# Altium PCB MainBoard.PcbDoc
Units mm, origin at the board's own origin, x right, y up, seen from the top; angles counter-clockwise.
Board outline 152.4 x 101.6 mm, 2 copper layers (Top Layer, Bottom Layer); 52 components, 40 nets, 203 pads, 51 vias.
Unrouted connection lines stored in the file: 105.
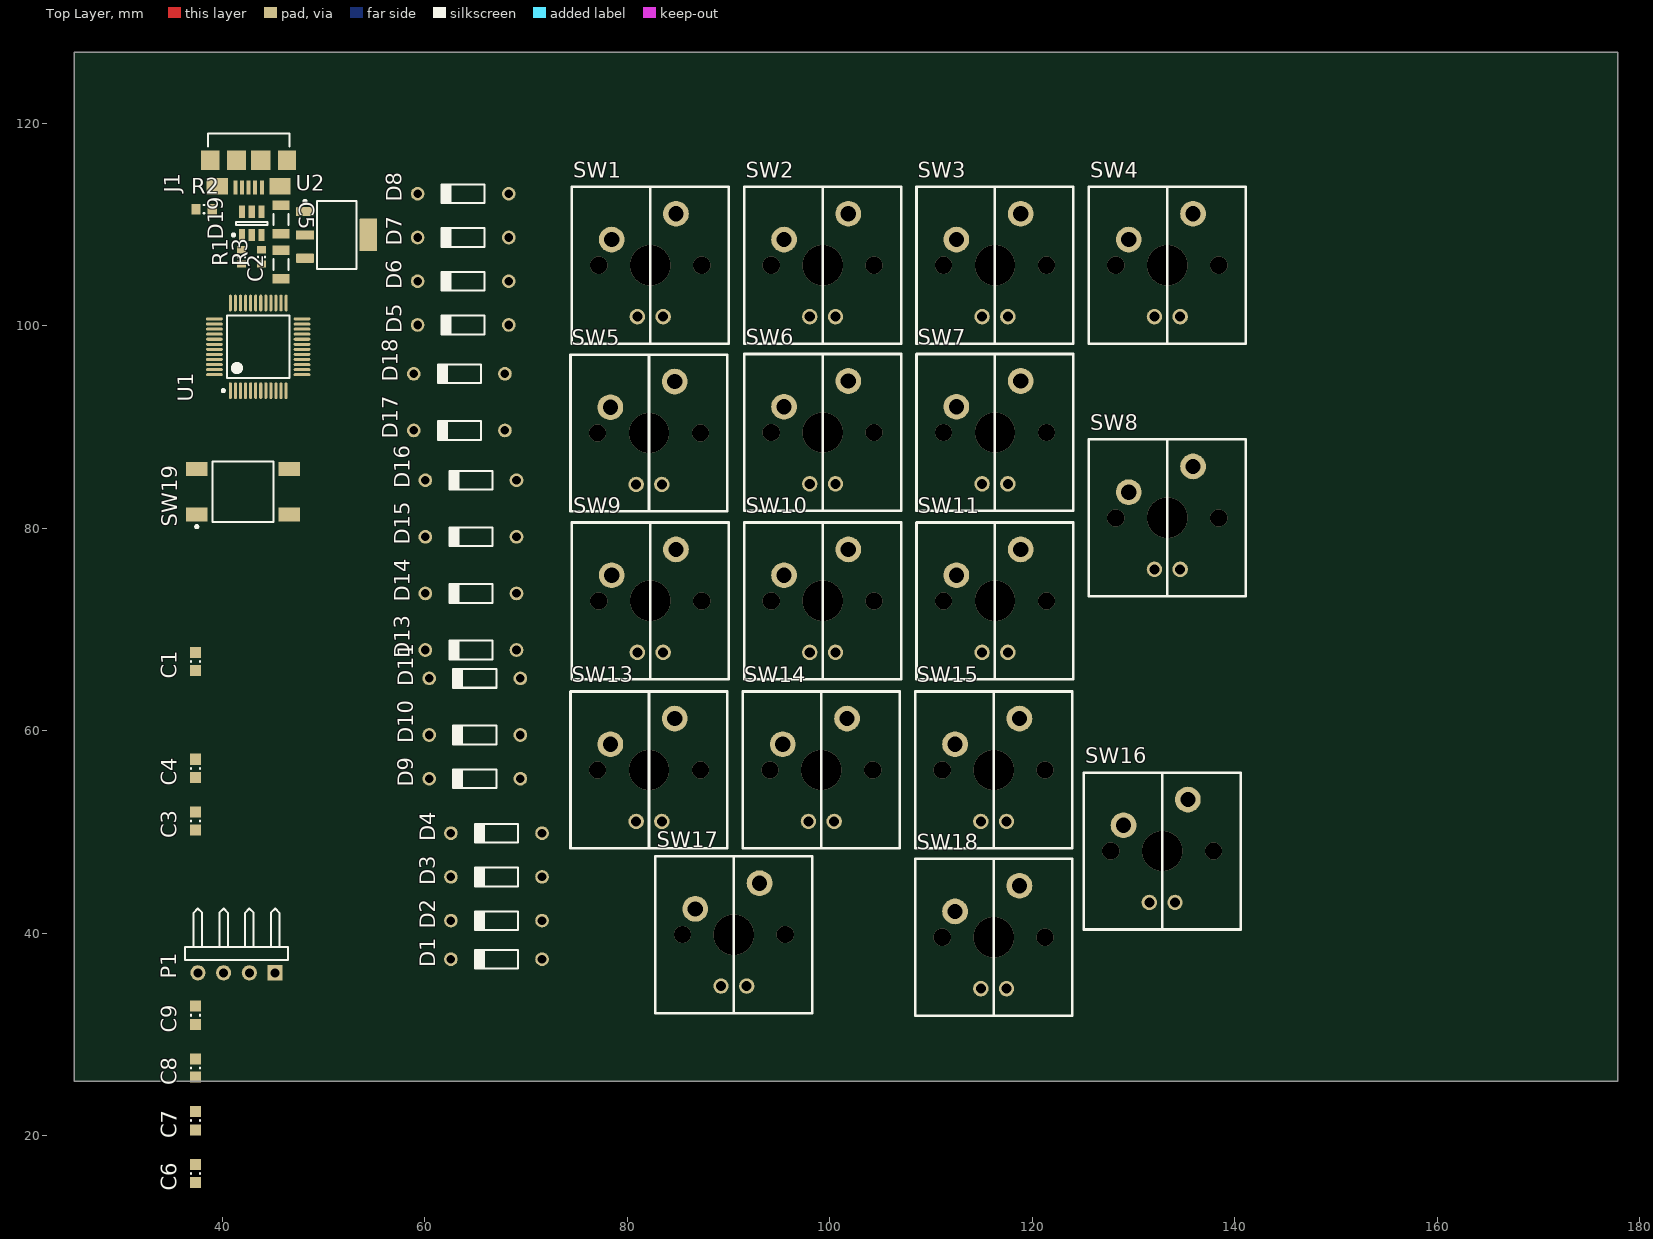
[diagram p0: Top Layer view]
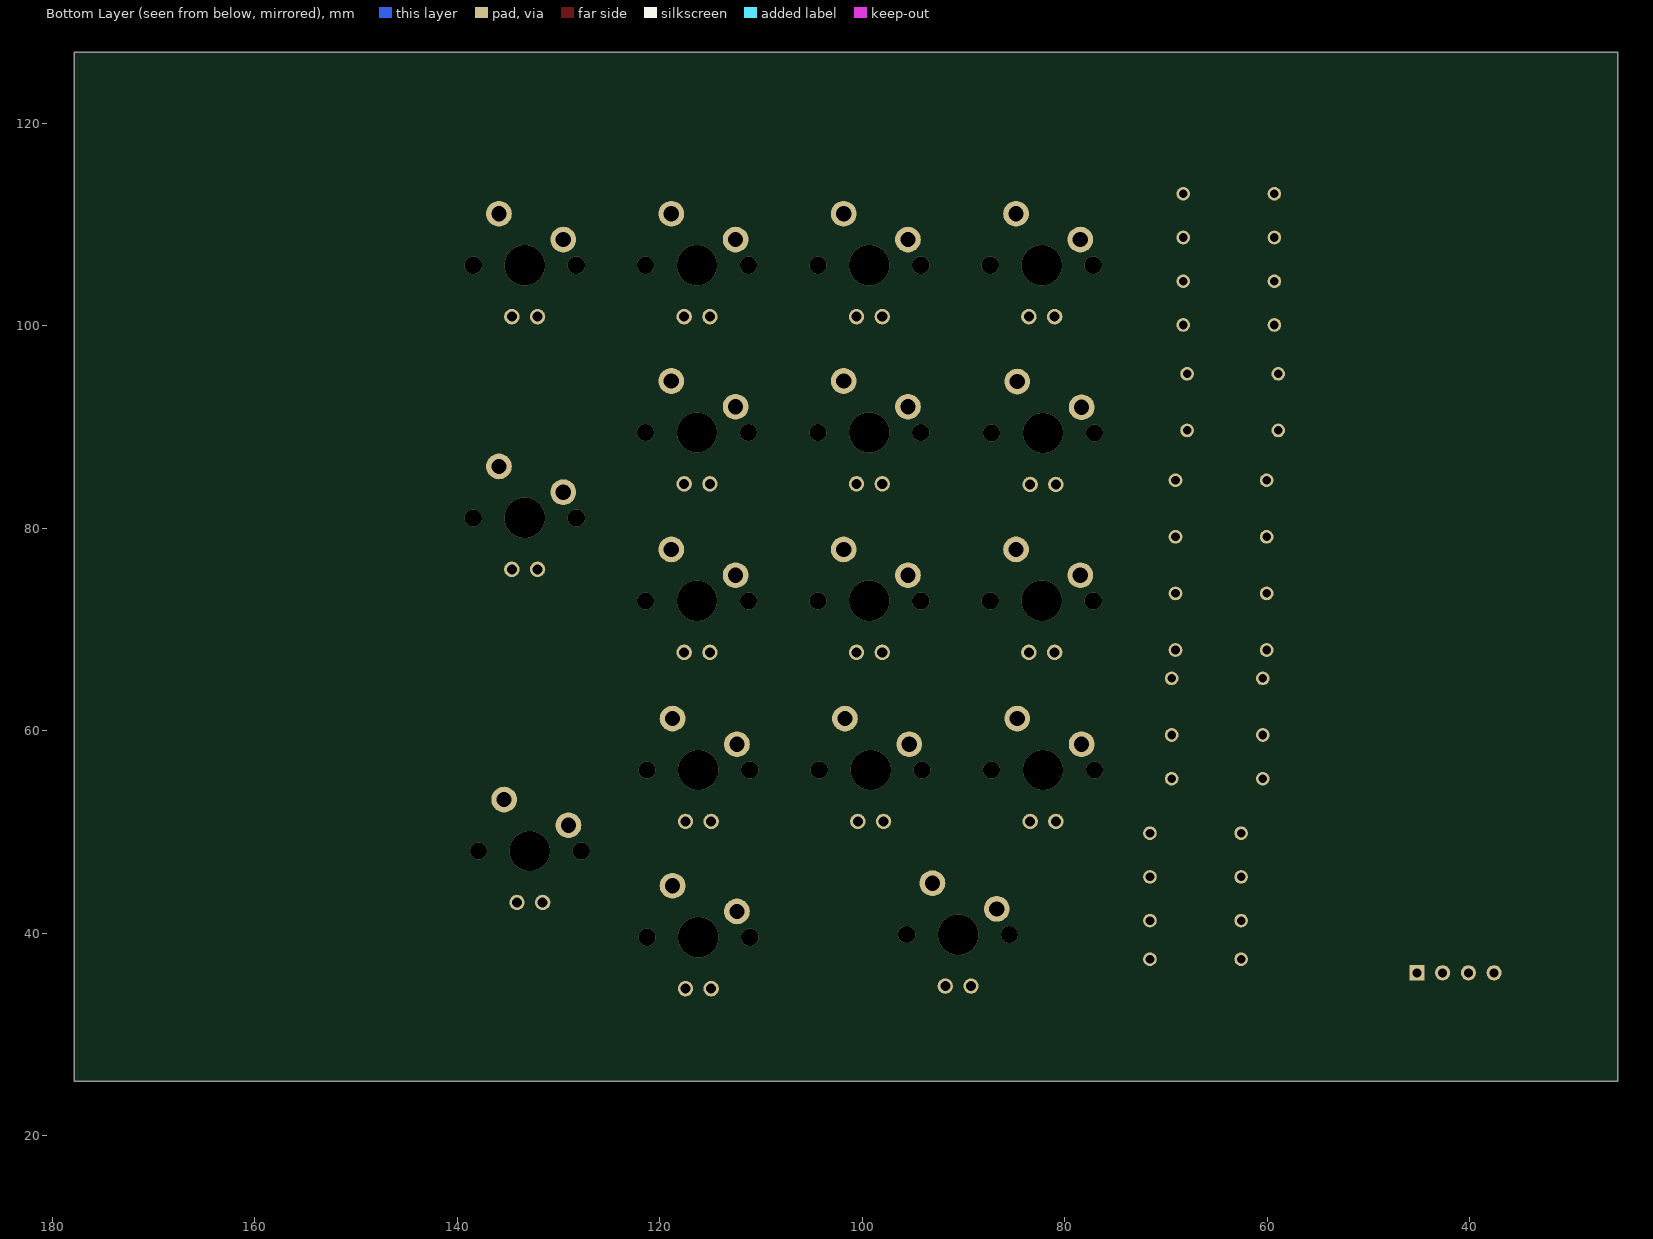
[diagram p1: Bottom Layer view, seen from below]

## Layer stack, top to bottom
Top Solder: solder mask 0.0102, Solder Resist, Dk 3.5
Top Layer: signal copper 0.0356
Dielectric 1: dielectric 0.32, FR-4, Dk 4.8
Bottom Layer: signal copper 0.0356
Bottom Solder: solder mask 0.0102, Solder Resist, Dk 3.5

## Board outline
25.4,25.4 177.8,25.4 177.8,127 25.4,127

## Design rules (kind name [scope] priority, off if disabled: settings)
Clearance [All] p1: gap=0.2 ignorepadtopadclearanceinfootprint=FALSE
PolygonConnect [All] p1: connectstyle=Relief reliefconductorwidth=0.254 reliefentries=4 polygonreliefangle="90 Angle" airgapwidth=0.254
RoomDefinition MCU [InComponentClass('MCU')] p1: confinementstyle=ConfineIn formatcopy=TRUE lockcomponents=FALSE outline 55.893,14.135 55.893,125.133 33.541,125.133 33.541,14.135
RoomDefinition Keys [InComponentClass('Keys')] p2: confinementstyle=ConfineIn formatcopy=TRUE lockcomponents=FALSE outline 6.707,31.17 178.411,31.17 178.411,117.53 6.707,117.53
RoutingVias [All] p1: holewidth=0.711 width=1.27 viastyle="Through Hole" minholewidth=0.711 minwidth=1.27 maxholewidth=0.711 maxwidth=1.27
SolderMaskExpansion [All] p1: expansion=0.06
Width [All] p1: maxlimit=0.254 minlimit=0.254 preferedwidth=0.254
30 further rules are at their usual default settings.

## Classes and differential pairs
component class MCU: C1 C2 C3 C4 C5 C6 C7 C8 C9 D19 J1 P1 R1 R2 R3 SW19 U1 U2
component class Keys: D1 D2 D3 D4 D5 D6 D7 D8 D9 D10 D11 D13 D14 D15 D16 D17 D18 SW1 SW2 SW3 SW4 SW5 SW6 SW7 SW8 SW9 SW10 SW11 SW13 SW14 SW15 SW16 SW17 SW18

## Components (designator, comment, footprint, x,y, rotation, side; value= is the part's Value field where it differs from the comment)
C1 "100nF" CAPC0603(1608)100_M 37.351,66.84 r90 top
C2 "10uF" CAPC1206(3216)190_L 45.811,106.042 r90 top
C3 "100nF" CAPC0603(1608)100_M 37.351,51.092 r90 top
C4 "100nF" CAPC0603(1608)100_M 37.351,56.299 r90 top
C5 "10uF" CAPC1206(3216)190_L 45.811,110.49 r270 top
C6 "100nF" CAPC0603(1608)100_M 37.351,16.294 r90 top
C7 "100nF" CAPC0603(1608)100_M 37.351,21.501 r90 top
C8 "100nF" CAPC0603(1608)100_M 37.351,26.708 r90 top
C9 "100nF" CAPC0603(1608)100_M 37.351,31.915 r90 top
D1 "1N4148" NXP-SOD27-2_V 67.087,37.448 r180 top
D2 "1N4148" NXP-SOD27-2_V 67.087,41.258 r180 top
D3 "1N4148" NXP-SOD27-2_V 67.087,45.576 r180 top
D4 "1N4148" NXP-SOD27-2_V 67.087,49.894 r180 top
D5 "1N4148" NXP-SOD27-2_V 63.802,100.076 r180 top
D6 "1N4148" NXP-SOD27-2_V 63.802,104.394 r180 top
D7 "1N4148" NXP-SOD27-2_V 63.802,108.712 r180 top
D8 "1N4148" NXP-SOD27-2_V 63.802,113.03 r180 top
D9 "1N4148" NXP-SOD27-2_V 64.945,55.272 r180 top
D10 "1N4148" NXP-SOD27-2_V 64.945,59.59 r180 top
D11 "1N4148" NXP-SOD27-2_V 64.945,65.178 r180 top
D13 "1N4148" NXP-SOD27-2_V 64.564,67.98 r180 top
D14 "1N4148" NXP-SOD27-2_V 64.564,73.568 r180 top
D15 "1N4148" NXP-SOD27-2_V 64.564,79.156 r180 top
D16 "1N4148" NXP-SOD27-2_V 64.564,84.744 r180 top
D17 "1N4148" NXP-SOD27-2_V 63.421,89.662 r180 top
D18 "1N4148" NXP-SOD27-2_V 63.421,95.25 r180 top
D19 "USBLC6-2SC6" STM-SOT23-6L_V 42.926,110.109 r90 top
J1 "10118192-0001LF" FCI-10118192-0001LF-5_V 42.615,116.332 r180 top
P1 "SWD" HDR1X4H 45.225,36.106 r180 top
R1 "10R" RESC0603(1608)_L 41.91,106.807 r90 top value="10.00 Ohm"
R2 "100K" RESC0603(1608)_N 38.227,111.506 r0 top value="100000.00 Ohm"
R3 "10R" RESC0603(1608)_L 43.876,106.807 r90 top value="10.00 Ohm"
SW1 "Cherry MX LED" "Cherry MX LED" 82.272,105.973 r0 top
SW2 "Cherry MX LED" "Cherry MX LED" 99.29,105.973 r0 top
SW3 "Cherry MX LED" "Cherry MX LED" 116.308,105.973 r0 top
SW4 "Cherry MX LED" "Cherry MX LED" 133.326,105.973 r0 top
SW5 "Cherry MX LED" "Cherry MX LED" 82.145,89.408 r0 top
SW6 "Cherry MX LED" "Cherry MX LED" 99.29,89.463 r0 top
SW7 "Cherry MX LED" "Cherry MX LED" 116.308,89.463 r0 top
SW8 "Cherry MX LED" "Cherry MX LED" 133.326,81.026 r0 top
SW9 "Cherry MX LED" "Cherry MX LED" 82.272,72.826 r0 top
SW10 "Cherry MX LED" "Cherry MX LED" 99.29,72.826 r0 top
SW11 "Cherry MX LED" "Cherry MX LED" 116.308,72.826 r0 top
SW13 "Cherry MX LED" "Cherry MX LED" 82.145,56.134 r0 top
SW14 "Cherry MX LED" "Cherry MX LED" 99.163,56.134 r0 top
SW15 "Cherry MX LED" "Cherry MX LED" 116.181,56.134 r0 top
SW16 "Cherry MX LED" "Cherry MX LED" 132.818,48.133 r0 top
SW17 "Cherry MX LED" "Cherry MX LED" 90.527,39.878 r0 top
SW18 "Cherry MX LED" "Cherry MX LED" 116.181,39.624 r0 top
SW19 "4-1437565-1" TECO-4-1437565-1_V 42.05,83.604 r90 top
U1 "STM32F072C8T6" STM-LQFP48_M 43.561,97.917 r90 top
U2 "LM1117IMP3.3" DCY0004A_N 51.308,108.966 r0 top

## Footprints (in the part's own frame and the unit in brackets; to place one, negate y for a bottom-side part, rotate by r counter-clockwise, add the part's x,y. Pads: shape width x height; smd on the part's side, far side on the other; paste and mask are expansions set on the pad)
CAPC0603(1608)100_M [mm] "Chip Capacitor, Body 1.6x0.8mm, Height 1.0mm, IPC Low Density"
  rect 1.1x1.1 smd: 1(-0.9,0) 2(0.9,0)
  silkscreen extent -0.05,-0.45 0.05,0.45, body extent -0.87,-0.47 0.88,0.48, height 1
CAPC1206(3216)190_L [mm] "Chip Capacitor, Body 3.2x1.6mm, Height 1.9mm, IPC High Density"
  rect 0.95x1.7 smd: 1(-1.4,0) 2(1.4,0)
  silkscreen extent -0.55,-0.75 0.55,0.75, body extent -1.7,-0.9 1.7,0.9, height 1.9
"Cherry MX LED" [mil]
  round 100 hole 59: 1(-150,100) 2(100,200)
  round 60 hole 39: 3(-50,-200) 4(50,-200)
  silkscreen extent -305,-305 305,305, body extent -310,-310 310,310, height 460
DCY0004A_N [mm] "SOT223, 4-Leads, Body 6.7x3.7mm, Pitch 2.3mm, IPC Medium Density"
  rrect11% 1.75x0.9 smd: 1(-3.125,2.3) 2(-3.125,0) 3(-3.125,-2.3)
  rrect6% 1.75x3.2 smd: 4(3.125,0)
  silkscreen extent -3.25,-3.35 1.95,3.42, body extent -3.5,-3.25 3.5,3.25, height 1.62
FCI-10118192-0001LF-5_V [mm] "SMD, 5-Leads, Body 8.05x5.77mm, Pitch 0.65mm"
  rect 0.4x1.35 smd: 1(-1.3,2.675) 2(-0.65,2.675) 3(0,2.675) 4(0.65,2.675) 5(1.3,2.675)
  rect 2.1x1.6 smd: 6(-3.1,2.55) 7(3.1,2.55)
  rect 1.8x1.9 smd: 8(-3.8,0) 9(3.8,0)
  rect 1.9x1.9 smd: 10(-1.2,0) 11(1.2,0)
  silkscreen extent -4.03,-2.67 4.03,-1.35, body extent -4.03,-2.67 4.03,3.1, height 2.7
HDR1X4H [mm] "Connector; Header; 4 Position; Right Angle"
  rect 1.5x1.5 hole 0.9: 1(0,0)
  round 1.5 hole 0.9: 2(2.54,0) 3(5.08,0) 4(7.62,0)
  silkscreen extent -1.27,-6.35 8.89,-1.27
NXP-SOD27-2_V [mm] "SOD27, 2-Leads, Dia 1.85mm, Body Length 4.25mm, Pin Spacing 9mm"
  round 1.35 hole 0.85: 1(-4.5,0) 2(4.5,0)
  silkscreen extent -2.12,-0.93 2.12,0.92, body extent -4.78,-0.92 4.78,0.92, height 1.84
RESC0603(1608)_L [mm] "Chip Resistor, Body 1.6x0.8mm, IPC High Density"
  rect 0.7x0.9 smd: 1(-0.7,0) 2(0.7,0)
  silkscreen extent -0.05,-0.35 0.05,0.35, body extent -0.85,-0.47 0.85,0.47, height 0.6
RESC0603(1608)_N [mm] "Chip Resistor, Body 1.6x0.8mm, IPC Medium Density"
  rect 0.9x1 smd: 1(-0.8,0) 2(0.8,0)
  silkscreen extent -0.05,-0.4 0.05,0.4, body extent -0.85,-0.47 0.85,0.47, height 0.6
STM-LQFP48_M [mm] "QFP, 48-Leads, Body 7x7mm, Pitch 0.5mm, IPC Low Density"
  oval 1.65x0.3 smd: 1(-4.325,2.75) 2(-4.325,2.25) 3(-4.325,1.75) 4(-4.325,1.25) 5(-4.325,0.75) 6(-4.325,0.25) 7(-4.325,-0.25) 8(-4.325,-0.75) 9(-4.325,-1.25) 10(-4.325,-1.75) 11(-4.325,-2.25) 12(-4.325,-2.75) 25(4.325,-2.75) 26(4.325,-2.25) 27(4.325,-1.75) 28(4.325,-1.25) 29(4.325,-0.75) 30(4.325,-0.25) 31(4.325,0.25) 32(4.325,0.75) 33(4.325,1.25) 34(4.325,1.75) 35(4.325,2.25) 36(4.325,2.75)
  oval 0.3x1.65 smd: 13(-2.75,-4.325) 14(-2.25,-4.325) 15(-1.75,-4.325) 16(-1.25,-4.325) 17(-0.75,-4.325) 18(-0.25,-4.325) 19(0.25,-4.325) 20(0.75,-4.325) 21(1.25,-4.325) 22(1.75,-4.325) 23(2.25,-4.325) 24(2.75,-4.325) 37(2.75,4.325) 38(2.25,4.325) 39(1.75,4.325) 40(1.25,4.325) 41(0.75,4.325) 42(0.25,4.325) 43(-0.25,4.325) 44(-0.75,4.325) 45(-1.25,4.325) 46(-1.75,4.325) 47(-2.25,4.325) 48(-2.75,4.325)
  silkscreen extent -4.45,-3.1 3.1,3.57, body extent -3.5,-3.5 3.5,3.5, height 1.6
STM-SOT23-6L_V [mm] "SOT23, 6-Leads, Body 3.05x1.75mm, Pitch 0.95mm"
  rect 1.2x0.6 smd: 1(-1.15,0.95) 2(-1.15,0) 3(-1.15,-0.95) 4(1.15,-0.95) 5(1.15,0) 6(1.15,0.95)
  silkscreen extent -1.27,-1.55 0.15,1.92, body extent -1.6,-1.53 1.6,1.53, height 1.45
TECO-4-1437565-1_V [mil] "SMD, 4-Leads, Body 6x6mm, Pitch 9.1mm"
  rect 55x83 smd: 1(-88.5,179.5) 2(-88.5,-179.5) 3(88.5,179.5) 4(88.5,-179.5)
  silkscreen extent -141,-118 118,184, body extent -118,-197 118,197, height 200

## Part data
C1 C3 C4 C6 C7 C8 C9: library part CMP-1035-02590-1, "CAP 100nF 25V -20% to +80% 0603 (1608 Metric) Thickness 1mm SMD", Case-EIA=0603, Case-Metric=1608, Rated Voltage="25 V", Tolerance="-20% to +80%", Max Thickness="1 mm", Technology=SMT
C2 C5: library part CMP-1037-04974-1, "CAP 10uF 16V ±10% 1206 (3216 Metric) Thickness 1.9mm SMD", Case-EIA=1206, Case-Metric=3216, Rated Voltage="16 V", Tolerance=±10%, Max Thickness="1.9 mm", Technology=SMT
D1 D2 D3 D4 D5 D6 D7 D8 D9 D10 D11 D13 D14 D15 D16 D17 D18: library part CMP-0648-00002-1, "High-speed Diode, 100 V, 450 mA, 2-Pin SOD27, RoHS", Manufacturer="NXP Semiconductors", Cd="4 pF Max.", ComponentLink1Description="Manufacturer URL", ComponentLink1URL=http://www.nxp.com/, ComponentLink2Description=Datasheet, ComponentLink2URL=http://www.nxp.com/documents/data_sheet/1N4148_1N4448.pdf, ComponentLink3Description="Package Specification", ComponentLink3URL=http://www.nxp.com/documents/data_sheet/1N4148_1N4448.pdf, Configuration=Single, DatasheetVersion=Aug-04, IF="200 mA Max.", IFRM="450 mA", IFSM="4 A Max.", IR (VR="20 V)=25 nA", Mounting Technology="Through Hole", PackageDescription="2-Pin Hermetically Sealed Glass Package, Axial Leaded, Dia 1.85 mm, Body Length 4.25 mm, Lead Spread 25.4 mm", PackageReference=SOD27, PackageVersion=Aug-04, PartNumber=1N4148, RoHS=TRUE, Trr="4 ns Max.", VF (IF="10 mA)=1 V", VR="100 V Max."
D19: library part CMP-2000-05378-1, "Very low capacitance ESD protection, 3.5 pF, -40 to 125 degC, 6-Pin SOT23, RoHS, Tape and Reel", Capacitance Value=3.5pF, Clamping Voltage=17V, Leakage Current=0.15uA, Manufacturer=STMicroelectronics, Operating Temperature Classification=Automotive, Operating Temperature Max Deg. C=125C, Operating Temperature Min Deg. C=-40C, Operating Temp Range=-40Cto125C, Package / Case=SOT-23, Package Description="6-Pin Small Outline Transistor, Body 2.925 x 1.625 mm, Pitch 0.95 mm", Package Reference=SOT23-6L, Peak Pulse Current=5A, Reverse Breakdown Voltage=6V, Reverse Stand-off Voltage=5V, Test Current (It)=1mA, Clamping Voltage (Max)=17V, Configuration=Dual, Datasheet URL=http://www.st.com/st-web-ui/static/active/en/resource/technical/document/datasheet/CD00050750.pdf, Datasheet Version="Rev. 5, 10/2011", Direction Type=Uni-Directional, Leakage Current (Max)=0.15uA, Manufacturer URL=http://www.st.com/, Mounting=SurfaceMount, Mounting Style=SurfaceMount, Number of Elements=1, Packaging=TapeandReel, Pin Count=6, Polarity=Uni-Directional, Product Depth (mm)=1.75mm, Product Height (mm)=1.3mm, Product Length (mm)=3.05mm, Rad Hardened=No, Suppressor Type=DiodeArrays, Working Voltage=5V, Working Voltage (Max)=5V
J1: library part CMP-2000-05118-1, "Micro USB B Type Receptacle, -55 to 85 degC, 5-Pin SMD, RoHS, Tape and Reel", Color=Black, Current Rating=1.8A, Flammability Rating=UL94V-0, Insulation Resistance=1000MOhms, Manufacturer=FCI, Operating Temperature Range=-55Cto+85C, Brand=FCI, Connector Type=MicroUSBTypeBreceptacle, Contact Material=CopperAlloy, Contact Plating=Gold, Datasheet URL=http://www.mouser.com/ds/2/154/10118192-793027.pdf, Datasheet Version="Rev. B, 05/2015", Factory Pack Quantity=1400, Gender=Female, Manufacturer URL=http://www.fci.com/, Mounting Angle=Right, Number of Contacts=5Contact, Packaging=Reel, Product=MicroUSBTypeBConnectors, Product Category=USBConnectors, RoHS=Details, Standard=USB2.0, Termination Style=SMD/SMT
P1: library part "Header 4H", "Header, 4-Pin, Right Angle", LatestRevisionDate=17-Jul-2002, LatestRevisionNote="Re-released for DXP Platform.", Publisher="Altium Limited"
R1 R3: library part CMP-1012-00284-1, "10R 0.1W 1% 0603 (1608 Metric)  SMD", Case-EIA=0603, Case-Metric=1608, Power="0.1 W", Tolerance="1 %", Technology=SMT
R2: library part CMP-1012-00736-1, "100K 0.1W 1% 0603 (1608 Metric)  SMD", Case-EIA=0603, Case-Metric=1608, Power="0.1 W", Tolerance="1 %", Technology=SMT
SW19: library part CMP-2000-05602-1, "Tactile Switch, 50 mA, 12 VDC, -20 to 85 degC, 4-Pin SMD, RoHS, Bulk", Actuator Color=N/A, Contact Rating @ Voltage=0.05@12VDCA, Dielectric Strength=500VAC, Manufacturer=TEConnectivity/AMPBrand, Maximum Contact Resistance=100mOhm, Maximum DC Voltage Rating=12V, Minimum Insulation Resistance=100MOhm, Operating Force=1.57N, Operating Temperature=-20to85C, Package Description="4-Pin Surface Mount Device, Body 6 x 6 mm, Pitch 9.1 mm", Actuator Length=1.4mm, Actuator Style=RoundButton, Base Material=N/A, Body Orientation=Straight, Contact Material=CopperAlloy, Contact Plating=Silver, Datasheet URL=https://datasheet.ciiva.com/14635/0900766b80912216-14635826.pdf, Datasheet Version=04/2007, Dimension=6x10x5.25mm, Electrical Life=100000Cycle, Family=FSMJSMA, Ground Terminal=No, Housing Material=N/A, Illumination Type=N/R, Manufacturer URL=http://www.te.com/, Maximum AC Voltage Rating=N/A, Mechanical Life=N/A, Mounting=SurfaceMount,GullWing, Mounting Technology=SurfaceMount, Package Reference=4-1437565-1, Packaging=Bulk, Part No=4-1437565-1, Pole Throw Configuration=N/A, Product Weight=N/A, RoHS=Yes, Seal Description=N/A, Seal Location=N/A, Switch Configuration=N/A, Type=N/A
U1: library part CMP-0304-00165-2, "ARM Cortex-M0 32-bit MCU, 64 KB Flash, 16 KB Internal RAM, 37 I/Os, 48-Pin LQFP, -40 to 85 degC, Tray", I/Os (High Current)=37, Manufacturer=STMicroelectronics, Operating Frequency(F) (Processor speed) (MHz)=48, Package Description="48-Pin Low Profile Quad Flat Package, Body 7 x 7 mm, Pitch 0.5 mm", Package Reference=LQFP48, Supply Voltage(Vcc) min (V)=2, ComponentLink1Description="Manufacturer URL", ComponentLink1URL=http://www.st.com/, ComponentLink2Description=Datasheet, ComponentLink2URL=http://www.st.com/st-web-ui/static/active/en/resource/technical/document/datasheet/DM00090510.pdf, Core="ARM Cortex-M0", D/A Converter=1, DatasheetVersion="Rev. 5", FLASH Size (Prog) (kB)=64, Internal RAM Size (kB)=16, Mounting Technology="Surface Mount", Packing=Tray, PartNumber=STM32F072C8T6
U2: library part CMP-0062-01631-4, "800mA Low-Dropout Linear Regulator, 4-pin SOT-223, Pb-Free", Manufacturer="Texas Instruments", PackageTopMarking=XYTT*N05B, PartNumber=LM1117IMP-3.3/NOPB, PowerWise=N, Code_IPC=SOT223-4, Code_JEDEC=TO-261-AA, ComponentLink1Description="Datasheet URL", ComponentLink1URL=http://www.ti.com/general/docs/lit/getliterature.tsp?genericPartNumber=LM1117-N&fileType=pdf, CompType="LDO IC", High-Reliability=Y, PackageDescription="Molded SOT-223, 6.50 x 3.56 x 1.6mm Body, 4 Lead, 2.3mm Pitch", PackageReference=DCY0004A, PinCount=4, RoHS=Y

## Via types
v1: diameter 1.702, hole 1.702, Top Layer to Bottom Layer, 34 vias
v2: diameter 3.988, hole 3.988, Top Layer to Bottom Layer, 17 vias

## Nets (pads, with @x,y where several pads share a name; then routed paths per layer and width w, separated by ;. In a path a pad name is that pad's centre, name@x,y a point inside that pad or via, vN(x,y) a via of type N, cw(c..) or ccw(c..) an arc to the next point about the centre after c; other vN are vias at no path point)
+3V3: C4.2 C5.2 C6.2 C7.2 C8.2 C9.2 P1.1 U1.1 U1.9 U1.24 U1.36 U1.48 U2.2 U2.4
+5V: C2.2 C3.2 D19.5 J1.1 U2.3
COL0: D1.1 D5.1 D9.1 D13.1 D17.1 U1.10
COL1: D2.1 D6.1 D10.1 D14.1 D18.1 U1.11
COL2: D3.1 D7.1 D11.1 D15.1 U1.12
COL3: D4.1 D8.1 D16.1 U1.13
DGND: C6.1 C7.1 C8.1 C9.1 P1.4
GND: C1.1 C2.1 C3.1 C4.1 C5.1 D19.2 J1.5 J1.6 J1.7 J1.8 J1.9 J1.10 J1.11 R2.1 SW19.3 SW19.4 U1.8 U1.23 U1.35 U1.44 U1.47 U2.1
NetC1_2: C1.2 SW19.1 SW19.2 U1.7
NetD1_2: D1.2 SW1.2
NetD2_2: D2.2 SW2.2
NetD3_2: D3.2 SW3.2
NetD4_2: D4.2 SW4.2
NetD5_2: D5.2 SW5.2
NetD6_2: D6.2 SW6.2
NetD7_2: D7.2 SW7.2
NetD8_2: D8.2 SW8.2
NetD9_2: D9.2 SW9.2
NetD10_2: D10.2 SW10.2
NetD11_2: D11.2 SW11.2
NetD13_2: D13.2 SW13.2
NetD14_2: D14.2 SW14.2
NetD15_2: D15.2 SW15.2
NetD16_2: D16.2 SW16.2
NetD17_2: D17.2 SW17.2
NetD18_2: D18.2 SW18.2
NetD19_1: D19.1 R1.2
NetD19_3: D19.3 R3.2
NetD19_4: D19.4 J1.2
NetD19_6: D19.6 J1.3
NetJ1_4: J1.4 R2.2
ROW0: SW1.1 SW2.1 SW3.1 SW4.1 U1.22
ROW1: SW5.1 SW6.1 SW7.1 SW8.1 U1.25
ROW2: SW9.1 SW10.1 SW11.1 U1.26
ROW3: SW13.1 SW14.1 SW15.1 SW16.1 U1.27
ROW4: SW17.1 SW18.1 U1.28
SW_CLK: P1.3 U1.37
SW_DIO: P1.2 U1.34
USB_DM: R3.1 U1.32
USB_DP: R1.1 U1.33
pads on no net: SW1.3 SW1.4 SW2.3 SW2.4 SW3.3 SW3.4 SW4.3 SW4.4 SW5.3 SW5.4 SW6.3 SW6.4 SW7.3 SW7.4 SW8.3 SW8.4 SW9.3 SW9.4 SW10.3 SW10.4 SW11.3 SW11.4 SW13.3 SW13.4 SW14.3 SW14.4 SW15.3 SW15.4 SW16.3 SW16.4 SW17.3 SW17.4 SW18.3 SW18.4 U1.2 U1.3 U1.4 U1.5 U1.6 U1.14 U1.15 U1.16 U1.17 U1.18 U1.19 U1.20 U1.21 U1.29 U1.30 U1.31 U1.38 U1.39 U1.40 U1.41 U1.42 U1.43 U1.45 U1.46
copper on no net:
  other v1: 111.101,39.624 121.261,39.624 85.447,39.878 95.607,39.878 127.738,48.133 137.898,48.133 77.065,56.134 87.225,56.134 94.083,56.134 104.243,56.134 111.101,56.134 121.261,56.134 77.192,72.826 87.352,72.826 94.21,72.826 104.37,72.826 111.228,72.826 121.388,72.826 128.246,81.026 138.406,81.026 77.065,89.408 87.225,89.408 94.21,89.463 104.37,89.463 111.228,89.463 121.388,89.463 77.192,105.973 87.352,105.973 94.21,105.973 104.37,105.973 111.228,105.973 121.388,105.973 128.246,105.973 138.406,105.973
  other v2: 116.181,39.624 90.527,39.878 132.818,48.133 82.145,56.134 99.163,56.134 116.181,56.134 82.272,72.826 99.29,72.826 116.308,72.826 133.326,81.026 82.145,89.408 99.29,89.463 116.308,89.463 82.272,105.973 99.29,105.973 116.308,105.973 133.326,105.973